# EAGLE board YutaAndJialiang v19 (EAGLE 9.7.0)
NAMES: Juta
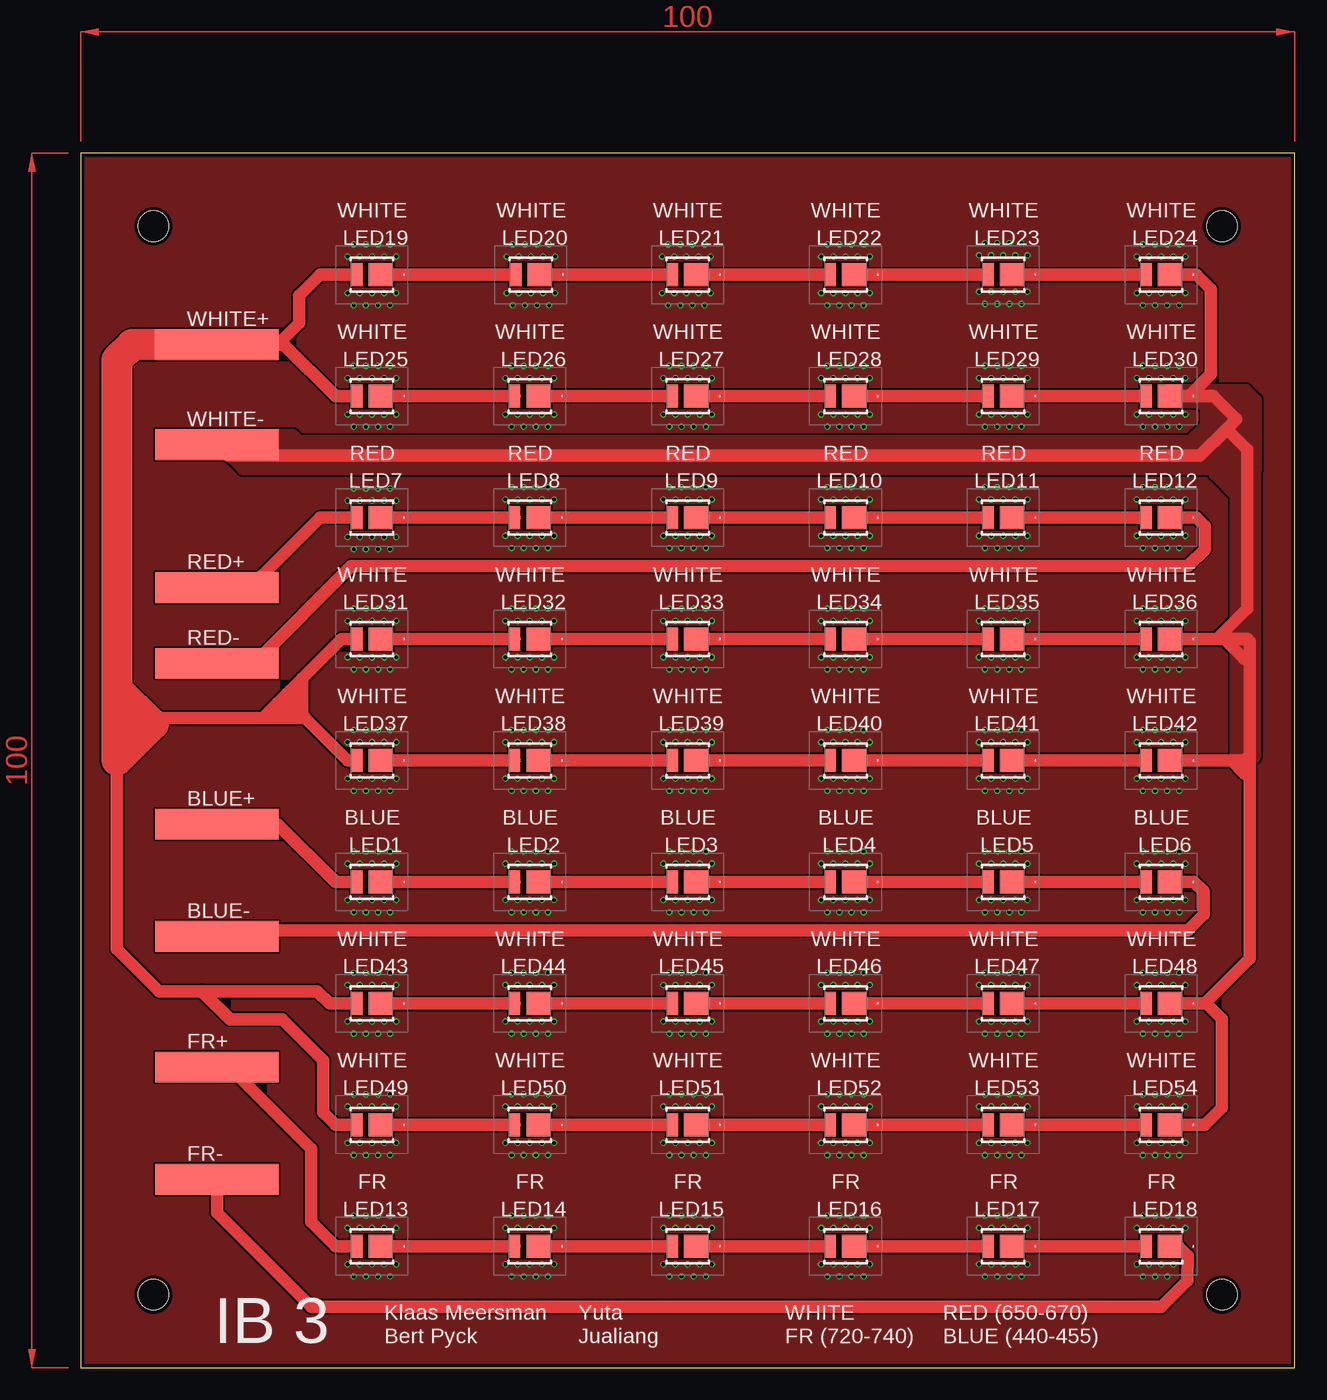
[diagram p0: board, top side]
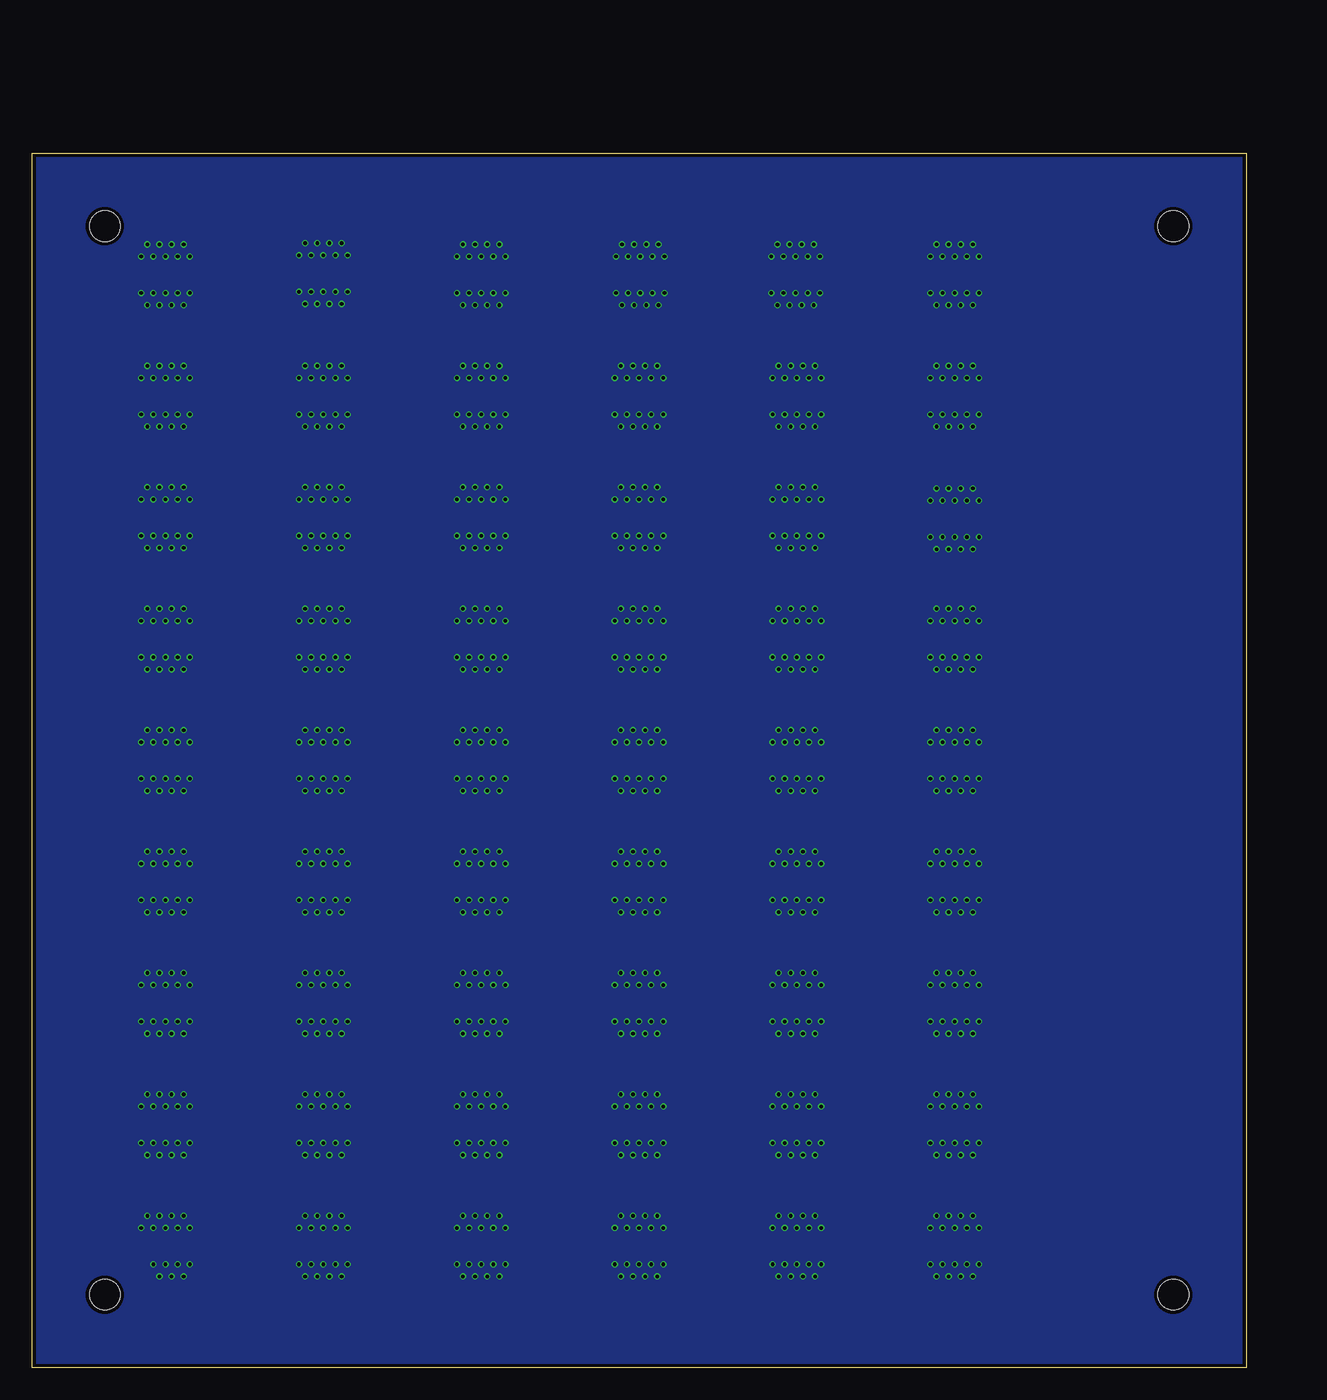
[diagram p1: board, bottom side, seen from below]

Size 99.99 x 100 mm. Coordinates in mm from the lower left corner, seen from the top.
Outline: 0,0 99.99,0 99.99,100 0,100 0,0
Copper layers (1*16): Top 0.035mm / dielectric 1.5mm / Bottom 0.035mm
Design rules "PCBWay_2L_152um-Track": minimum track width 6mil, minimum drill 0.3mm, track to track 6mil, track to pad 6mil, pad to pad 6mil, via to via 6mil, smd to smd 0mil, copper to edge 0.3mm, drill to drill 10mil, minimum pad ring 6mil, minimum via ring 0.1mm, stop-mask expansion 2mil, vias tented up to drill 0.45mm, thermal gap 0.2mm
Net classes: 0 default: width 0.5 mm, drill 0.3 mm, clearance 0.1 mm
Holes 2.5 mm at 6,94 94,94 94,6 6,6

## Footprints (pad centres in the part's own frame; a part is rotated, then mirrored left to right if it is on the bottom)
SOLDERPAD = smd 2.54 x 10.16: 1 0,0
L1SP-PNK1002800000 = smd 2.03 x 1.9: 1 -0.735,0 | smd 0.97 x 1.9: 2 1.265,0

## Placement (x,y rotation side)
BLUE+  [SOLDERPAD]  11.25,44.75 270 top
BLUE-  [SOLDERPAD]  11.25,35.5 270 top
FR+  [SOLDERPAD]  11.25,24.75 270 top
FR-  [SOLDERPAD]  11.25,15.5 270 top
LED1  BLUE  [L1SP-PNK1002800000]  24,40 180 top
LED2  BLUE  [L1SP-PNK1002800000]  37,40 180 top
LED3  BLUE  [L1SP-PNK1002800000]  50,40 180 top
LED4  BLUE  [L1SP-PNK1002800000]  63,40 180 top
LED5  BLUE  [L1SP-PNK1002800000]  76,40 180 top
LED6  BLUE  [L1SP-PNK1002800000]  89,40 180 top
LED7  RED  [L1SP-PNK1002800000]  24,70 180 top
LED8  RED  [L1SP-PNK1002800000]  37,70 180 top
LED9  RED  [L1SP-PNK1002800000]  50,70 180 top
LED10  RED  [L1SP-PNK1002800000]  63,70 180 top
LED11  RED  [L1SP-PNK1002800000]  76,70 180 top
LED12  RED  [L1SP-PNK1002800000]  89,70 180 top
LED13  FR  [L1SP-PNK1002800000]  24,10 180 top
LED14  FR  [L1SP-PNK1002800000]  37,10 180 top
LED15  FR  [L1SP-PNK1002800000]  50,10 180 top
LED16  FR  [L1SP-PNK1002800000]  63,10 180 top
LED17  FR  [L1SP-PNK1002800000]  76,10 180 top
LED18  FR  [L1SP-PNK1002800000]  89,10 180 top
LED19  WHITE  [L1SP-PNK1002800000]  24,90 180 top
LED20  WHITE  [L1SP-PNK1002800000]  37.1,90 180 top
LED21  WHITE  [L1SP-PNK1002800000]  50,90 180 top
LED22  WHITE  [L1SP-PNK1002800000]  63,90 180 top
LED23  WHITE  [L1SP-PNK1002800000]  76,90 180 top
LED24  WHITE  [L1SP-PNK1002800000]  89,90 180 top
LED25  WHITE  [L1SP-PNK1002800000]  24,80 180 top
LED26  WHITE  [L1SP-PNK1002800000]  37,80 180 top
LED27  WHITE  [L1SP-PNK1002800000]  50,80 180 top
LED28  WHITE  [L1SP-PNK1002800000]  63,80 180 top
LED29  WHITE  [L1SP-PNK1002800000]  76,80 180 top
LED30  WHITE  [L1SP-PNK1002800000]  89,80 180 top
LED31  WHITE  [L1SP-PNK1002800000]  24,60 180 top
LED32  WHITE  [L1SP-PNK1002800000]  37,60 180 top
LED33  WHITE  [L1SP-PNK1002800000]  50,60 180 top
LED34  WHITE  [L1SP-PNK1002800000]  63,60 180 top
LED35  WHITE  [L1SP-PNK1002800000]  76,60 180 top
LED36  WHITE  [L1SP-PNK1002800000]  89,60 180 top
LED37  WHITE  [L1SP-PNK1002800000]  24,50 180 top
LED38  WHITE  [L1SP-PNK1002800000]  37,50 180 top
LED39  WHITE  [L1SP-PNK1002800000]  50,50 180 top
LED40  WHITE  [L1SP-PNK1002800000]  63,50 180 top
LED41  WHITE  [L1SP-PNK1002800000]  76,50 180 top
LED42  WHITE  [L1SP-PNK1002800000]  89,50 180 top
LED43  WHITE  [L1SP-PNK1002800000]  24,30 180 top
LED44  WHITE  [L1SP-PNK1002800000]  37,30 180 top
LED45  WHITE  [L1SP-PNK1002800000]  50,30 180 top
LED46  WHITE  [L1SP-PNK1002800000]  63,30 180 top
LED47  WHITE  [L1SP-PNK1002800000]  76,30 180 top
LED48  WHITE  [L1SP-PNK1002800000]  89,30 180 top
LED49  WHITE  [L1SP-PNK1002800000]  24,20 180 top
LED50  WHITE  [L1SP-PNK1002800000]  37,20 180 top
LED51  WHITE  [L1SP-PNK1002800000]  50,20 180 top
LED52  WHITE  [L1SP-PNK1002800000]  63,20 180 top
LED53  WHITE  [L1SP-PNK1002800000]  76,20 180 top
LED54  WHITE  [L1SP-PNK1002800000]  89,20 180 top
RED+  [SOLDERPAD]  11.25,64.25 270 top
RED-  [SOLDERPAD]  11.25,58 270 top
WHITE+  [SOLDERPAD]  11.25,84.25 270 top
WHITE-  [SOLDERPAD]  11.25,76 270 top

## Library data of the parts
BLUE+ BLUE- FR+ FR- RED+ RED- WHITE+ WHITE- = LibraryLEDs
LED1-LED54 = Luxeon SunPlus 2835; DESCRIPTION: High Power LEDs - Single Color 2835 Mid-Power ColorFar Red 720-740nm; HEIGHT: mm; MANUFACTURER_NAME: CREE LED; MANUFACTURER_PART_NUMBER: JE2835AFR-N-0001A0000-N0000001; MOUSER_PART_NUMBER: 941-JE2835AFRN01AN; MOUSER_PRICE-STOCK: https://www.mouser.co.uk/ProductDetail/Cree-LED/JE2835AFR-N-0001A0000-N0000001?qs=tlsG%2FOw5FFhxeS5Ond46kw%3D%3D

## Nets
N$1: LED7.2 RED+.1
N$2: LED28.1 LED29.2
N$3: LED7.1 LED8.2
N$4: LED8.1 LED9.2
N$5: LED9.1 LED10.2
N$6: LED10.1 LED11.2
N$7: LED11.1 LED12.2
N$8: BLUE-.1 LED6.1
N$9: FR+.1 LED13.2
N$10: LED19.2 LED25.2 LED31.2 LED37.2 LED43.2 LED49.2 WHITE+.1
N$11: LED24.1 LED30.1 LED36.1 LED42.1 LED48.1 LED54.1 WHITE-.1
N$12: LED19.1 LED20.2
N$13: LED29.1 LED30.2
N$14: LED20.1 LED21.2
N$15: LED21.1 LED22.2
N$16: LED22.1 LED23.2
N$17: LED13.1 LED14.2
N$18: LED14.1 LED15.2
N$19: LED15.1 LED16.2
N$20: LED16.1 LED17.2
N$21: LED17.1 LED18.2
N$22: LED23.1 LED24.2
N$23: FR-.1 LED18.1
N$24: LED25.1 LED26.2
N$25: LED26.1 LED27.2
N$26: LED27.1 LED28.2
N$27: LED12.1 RED-.1
N$31: LED31.1 LED32.2
N$33: LED32.1 LED33.2
N$35: BLUE+.1 LED1.2
N$36: LED1.1 LED2.2
N$37: LED2.1 LED3.2
N$38: LED3.1 LED4.2
N$39: LED4.1 LED5.2
N$40: LED5.1 LED6.2
N$41: LED33.1 LED34.2
N$42: LED34.1 LED35.2
N$43: LED35.1 LED36.2
N$45: LED37.1 LED38.2
N$46: LED38.1 LED39.2
N$47: LED39.1 LED40.2
N$48: LED40.1 LED41.2
N$49: LED41.1 LED42.2
N$51: LED43.1 LED44.2
N$53: LED44.1 LED45.2
N$54: LED45.1 LED46.2
N$55: LED46.1 LED47.2
N$56: LED47.1 LED48.2
N$58: LED49.1 LED50.2
N$59: LED50.1 LED51.2
N$60: LED51.1 LED52.2
N$61: LED52.1 LED53.2
N$62: LED53.1 LED54.2

## Tracks (layer width: path | path; a pad name or v marks a point on that pad's centre or on a via)
N$1
  Top 1.016: LED7.2 19.73,70 15,65.27 15,64 11.5,64 RED+.1
N$2
  Top 1.016: LED29.2 LED28.1
N$3
  Top 1.016: LED7.1 LED8.2
N$4
  Top 1.016: LED8.1 LED9.2
N$5
  Top 1.016: LED9.1 LED10.2
N$6
  Top 1.016: LED10.1 LED11.2
N$7
  Top 1.016: LED11.1 LED12.2
N$8
  Top 1.016: LED6.1 91.7,40 92.5,39.2 92.5,37.3 91.2,36 11.75,36 BLUE-.1
N$9
  Top 1.016: LED13.2 21,10 19,12 19,18 12.25,24.75 FR+.1
N$10
  Top 1.016: LED19.2 19.73,90 18,88.27 18,86 16.25,84.25 | LED25.2 21,80 16.75,84.25 16.25,84.25 | 18.5,53.5 22,50 LED37.2 | LED43.2 20.5,30 19.5,31 10,31 | LED49.2 21,20 19.99,21.01 19.99,25.29 16.6,28.68 12.32,28.68 10,31 | LED31.2 21.5,60 18.25,56.75 | 10,31 6.47,31 3,34.47 3,50 | WHITE+.1 16.25,84.25 | 6,53 6.5,53.5 15,53.5 | 15,53.5 16,53.5 | 16,53.5 17,53.5 | 17,53.5 18,53.5 | 18,53.5 18.5,53.5 | 17,55.5 16.25,54.75 | 16.25,54.75 15,53.5 | 18.25,56.75 18.25,53.75 18.5,53.5 | 17,53.5 17,55.5 | 17,55.5 17.25,55.75 | 17.25,55.75 18.25,56.75 | 18,53.5 18,55 17.25,55.75 | 16,53.5 16.25,53.75 16.25,54.75
  Top 2.54: WHITE+.1 4.25,84.25 3,83 3,55.9 | 3,55.9 3,54.8 3,50 6,53 5.9,53 3,55.9
N$11
  Top 1.016: LED24.1 91.9,90 93.1,88.8 93.1,81.8 91.3,80 LED30.1 93.3,80 95.2,78.1 94.4,77.3 | 96.3,48.9 96.3,33.7 92.6,30 LED48.1 92.7,30 94,28.7 94,21.4 92.6,20 LED54.1 | WHITE-.1 12.15,75.1 92.2,75.1 94.4,77.3 | LED42.1 94.8,50 | 94.8,50 95.8,50 96.3,50.5 | 96.3,50.5 96.3,59.8 96.1,60 94.2,60 | LED36.1 93.6,60 | 93.6,60 96.1,62.5 96.1,75.6 94.4,77.3 | 93.6,60 94.2,60 | 94.2,60 95.8,58.4 | 96.3,48.9 95.9,48.9 94.8,50 | 96.3,48.9 96.3,50.5
  pour Top (no thermals): 92.2,79.47 92.31,79.41 93.77,77.95 93.54,80.49 89.51,80.49 89.51,79.51 92.07,79.51
  pour Top (no thermals): 92.51,76.39 92.4,76.33 92.27,76.29 16.51,76.29 16.51,74.01 96.79,74.01 96.79,79.69 95.99,80.49 92.71,80.49 92.71,76.73 92.67,76.6 92.61,76.49
  pour Top (no thermals): 90.63,75.51 93.29,75.51 93.29,78.17
  pour Top (no thermals): 13.41,74.01 18.49,74.01 18.49,75.79 17.49,76.79 12.51,76.79 12.51,74.91
  pour Top (no thermals): 95.87,50.67 96.02,50.67 96.02,78.23 95.87,78.23
  pour Top (no thermals): 93.94,74.15 95.73,72.37 95.73,73.77 95.07,74.43 93.87,74.43 93.87,74.29 93.89,74.27
N$12
  Top 1.016: LED19.1 LED20.2
N$13
  Top 1.016: LED30.2 LED29.1
N$14
  Top 1.016: LED20.1 LED21.2
N$15
  Top 1.016: LED21.1 LED22.2
N$16
  Top 1.016: LED22.1 LED23.2
N$17
  Top 1.016: LED13.1 LED14.2
N$18
  Top 1.016: LED14.1 LED15.2
N$19
  Top 1.016: LED15.1 LED16.2
N$20
  Top 1.016: LED16.1 LED17.2
N$21
  Top 1.016: LED17.1 LED18.2
N$22
  Top 1.016: LED23.1 LED24.2
N$23
  Top 1.016: LED18.1 90.4,10 91.18,9.22 91.15,7.15 89,5 19,5 11.25,12.75 FR-.1
N$24
  Top 1.016: LED26.2 LED25.1
N$25
  Top 1.016: LED27.2 LED26.1
N$26
  Top 1.016: LED28.2 LED27.1
N$27
  Top 1.016: LED12.1 91.9,70 92.58,69.32 92.58,67.38 91.2,66 22.28,66 14.28,58 RED-.1
N$31
  Top 1.016: LED31.1 LED32.2
N$33
  Top 1.016: LED32.1 LED33.2
N$35
  Top 1.016: LED1.2 21,40 16.25,44.75 BLUE+.1
N$36
  Top 1.016: LED1.1 LED2.2
N$37
  Top 1.016: LED2.1 LED3.2
N$38
  Top 1.016: LED3.1 LED4.2
N$39
  Top 1.016: LED4.1 LED5.2
N$40
  Top 1.016: LED5.1 LED6.2
N$41
  Top 1.016: LED33.1 LED34.2
N$42
  Top 1.016: LED34.1 LED35.2
N$43
  Top 1.016: LED35.1 LED36.2
N$45
  Top 1.016: LED38.2 LED37.1
N$46
  Top 1.016: LED39.2 LED38.1
N$47
  Top 1.016: LED40.2 LED39.1
N$48
  Top 1.016: LED41.2 LED40.1
N$49
  Top 1.016: LED42.2 LED41.1
N$51
  Top 1.016: LED43.1 LED44.2
N$53
  Top 1.016: LED44.1 LED45.2
N$54
  Top 1.016: LED45.1 LED46.2
N$55
  Top 1.016: LED46.1 LED47.2
N$56
  Top 1.016: LED47.1 LED48.2
N$58
  Top 1.016: LED50.2 LED49.1
N$59
  Top 1.016: LED51.2 LED50.1
N$60
  Top 1.016: LED52.2 LED51.1
N$61
  Top 1.016: LED53.2 LED52.1
N$62
  Top 1.016: LED54.2 LED53.1
THERMAL  (via drill 0.3 pad 0.34)
  other vias: 22.5,92.5 23.5,92.5 24.5,92.5 25.5,92.5 22,91.5 23,91.5 24,91.5 25,91.5 26,91.5 22,88.5 23,88.5 24,88.5 25,88.5 26,88.5 22.5,87.5 23.5,87.5 24.5,87.5 25.5,87.5 22,78.5 23,78.5 24,78.5 25,78.5 26,78.5 22.5,77.5 23.5,77.5 24.5,77.5 25.5,77.5 35.5,82.5 36.5,82.5 37.5,82.5 38.5,82.5 35,81.5 36,81.5 37,81.5 38,81.5 39,81.5 35,78.5 36,78.5 37,78.5 38,78.5 39,78.5 35.5,77.5 36.5,77.5 37.5,77.5 38.5,77.5 48.5,82.5 49.5,82.5 50.5,82.5 51.5,82.5 48,81.5 49,81.5 50,81.5 51,81.5 52,81.5 48,78.5 49,78.5 50,78.5 51,78.5 52,78.5 48.5,77.5 49.5,77.5 50.5,77.5 51.5,77.5 61.5,82.5 62.5,82.5 63.5,82.5 64.5,82.5 61,81.5 62,81.5 63,81.5 64,81.5 65,81.5 61,78.5 62,78.5 63,78.5 64,78.5 65,78.5 61.5,77.5 62.5,77.5 63.5,77.5 64.5,77.5 48.4,92.5 49.4,92.5 50.4,92.5 51.4,92.5 47.9,91.5 48.9,91.5 49.9,91.5 50.9,91.5 51.9,91.5 47.9,88.5 48.9,88.5 49.9,88.5 50.9,88.5 51.9,88.5 48.4,87.5 49.4,87.5 50.4,87.5 51.4,87.5 35.6,92.5 36.6,92.5 37.6,92.5 38.6,92.5 35.1,91.5 36.1,91.5 37.1,91.5 38.1,91.5 39.1,91.5 35.1,88.5 36.1,88.5 37.1,88.5 38.1,88.5 39.1,88.5 35.6,87.5 36.6,87.5 37.6,87.5 38.6,87.5 74.5,82.5 75.5,82.5 76.5,82.5 77.5,82.5 74,81.5 75,81.5 76,81.5 77,81.5 78,81.5 74,78.5 75,78.5 76,78.5 77,78.5 78,78.5 74.5,77.5 75.5,77.5 76.5,77.5 77.5,77.5 87.5,82.5 88.5,82.5 89.5,82.5 90.5,82.5 87,81.5 88,81.5 89,81.5 90,81.5 91,81.5 87,78.5 88,78.5 89,78.5 90,78.5 91,78.5 87.5,77.5 88.5,77.5 89.5,77.5 90.5,77.5 22.5,72.4 23.5,72.4 24.5,72.4 25.5,72.4 22,71.4 23,71.4 24,71.4 25,71.4 26,71.4 22,68.4 23,68.4 24,68.4 25,68.4 26,68.4 22.5,67.4 23.5,67.4 24.5,67.4 25.5,67.4 35.5,72.5 36.5,72.5 37.5,72.5 38.5,72.5 35,71.5 36,71.5 37,71.5 38,71.5 39,71.5 35,68.5 36,68.5 37,68.5 38,68.5 39,68.5 35.5,67.5 36.5,67.5 37.5,67.5 38.5,67.5 48.5,72.5 49.5,72.5 50.5,72.5 51.5,72.5 48,71.5 49,71.5 50,71.5 51,71.5 52,71.5 48,68.5 49,68.5 50,68.5 51,68.5 52,68.5 48.5,67.5 49.5,67.5 50.5,67.5 51.5,67.5 61.5,72.5 62.5,72.5 63.5,72.5 64.5,72.5 61,71.5 62,71.5 63,71.5 64,71.5 65,71.5 61,68.5 62,68.5 63,68.5 64,68.5 65,68.5 61.5,67.5 62.5,67.5 63.5,67.5 64.5,67.5 74.5,72.5 75.5,72.5 76.5,72.5 77.5,72.5 74,71.5 75,71.5 76,71.5 77,71.5 78,71.5 74,68.5 75,68.5 76,68.5 77,68.5 78,68.5 74.5,67.5 75.5,67.5 76.5,67.5 77.5,67.5 87.5,72.5 88.5,72.5 89.5,72.5 90.5,72.5 87,71.5 88,71.5 89,71.5 90,71.5 91,71.5 87,68.5 88,68.5 89,68.5 90,68.5 91,68.5 87.5,67.5 88.5,67.5 89.5,67.5 90.5,67.5 22.5,62.5 23.5,62.5 24.5,62.5 25.5,62.5 22,61.5 23,61.5 24,61.5 25,61.5 26,61.5 22,58.5 23,58.5 24,58.5 25,58.5 26,58.5 22.5,57.5 23.5,57.5 24.5,57.5 25.5,57.5 35.5,62.5 36.5,62.5 37.5,62.5 38.5,62.5 35,61.5 36,61.5 37,61.5 38,61.5 39,61.5 35,58.5 36,58.5 37,58.5 38,58.5 39,58.5 35.5,57.5 36.5,57.5 37.5,57.5 38.5,57.5 48.5,62.5 49.5,62.5 50.5,62.5 51.5,62.5 48,61.5 49,61.5 50,61.5 51,61.5 52,61.5 48,58.5 49,58.5 50,58.5 51,58.5 52,58.5 48.5,57.5 49.5,57.5 50.5,57.5 51.5,57.5 61.5,62.5 62.5,62.5 63.5,62.5 64.5,62.5 61,61.5 62,61.5 63,61.5 64,61.5 65,61.5 61,58.5 62,58.5 63,58.5 64,58.5 65,58.5 61.5,57.5 62.5,57.5 63.5,57.5 64.5,57.5 74.5,62.5 75.5,62.5 76.5,62.5 77.5,62.5 74,61.5 75,61.5 76,61.5 77,61.5 78,61.5 74,58.5 75,58.5 76,58.5 77,58.5 78,58.5 74.5,57.5 75.5,57.5 76.5,57.5 77.5,57.5 87.5,62.5 88.5,62.5 89.5,62.5 90.5,62.5 87,61.5 88,61.5 89,61.5 90,61.5 91,61.5 87,58.5 88,58.5 89,58.5 90,58.5 91,58.5 87.5,57.5 88.5,57.5 89.5,57.5 90.5,57.5 22.5,52.5 23.5,52.5 24.5,52.5 25.5,52.5 22,51.5 23,51.5 24,51.5 25,51.5 26,51.5 22,48.5 23,48.5 24,48.5 25,48.5 26,48.5 22.5,47.5 23.5,47.5 24.5,47.5 25.5,47.5 35.5,52.5 36.5,52.5 37.5,52.5 38.5,52.5 35,51.5 36,51.5 37,51.5 38,51.5 39,51.5 35,48.5 36,48.5 37,48.5 38,48.5 39,48.5 35.5,47.5 36.5,47.5 37.5,47.5 38.5,47.5 48.5,52.5 49.5,52.5 50.5,52.5 51.5,52.5 48,51.5 49,51.5 50,51.5 51,51.5 52,51.5 48,48.5 49,48.5 50,48.5 51,48.5 52,48.5 48.5,47.5 49.5,47.5 50.5,47.5 51.5,47.5 61.5,52.5 62.5,52.5 63.5,52.5 64.5,52.5 61,51.5 62,51.5 63,51.5 64,51.5 65,51.5 61,48.5 62,48.5 63,48.5 64,48.5 65,48.5 61.5,47.5 62.5,47.5 63.5,47.5 64.5,47.5 74.5,52.5 75.5,52.5 76.5,52.5 77.5,52.5 74,51.5 75,51.5 76,51.5 77,51.5 78,51.5 74,48.5 75,48.5 76,48.5 77,48.5 78,48.5 74.5,47.5 75.5,47.5 76.5,47.5 77.5,47.5 87.5,52.5 88.5,52.5 89.5,52.5 90.5,52.5 87,51.5 88,51.5 89,51.5 90,51.5 91,51.5 87,48.5 88,48.5 89,48.5 90,48.5 91,48.5 87.5,47.5 88.5,47.5 89.5,47.5 90.5,47.5 22.5,42.5 23.5,42.5 24.5,42.5 25.5,42.5 22,41.5 23,41.5 24,41.5 25,41.5 26,41.5 22,38.5 23,38.5 24,38.5 25,38.5 26,38.5 22.5,37.5 23.5,37.5 24.5,37.5 25.5,37.5 35.5,42.5 36.5,42.5 37.5,42.5 38.5,42.5 35,41.5 36,41.5 37,41.5 38,41.5 39,41.5 35,38.5 36,38.5 37,38.5 38,38.5 39,38.5 35.5,37.5 36.5,37.5 37.5,37.5 38.5,37.5 48.5,42.5 49.5,42.5 50.5,42.5 51.5,42.5 48,41.5 49,41.5 50,41.5 51,41.5 52,41.5 48,38.5 49,38.5 50,38.5 51,38.5 52,38.5 48.5,37.5 49.5,37.5 50.5,37.5 51.5,37.5 61.5,42.5 62.5,42.5 63.5,42.5 64.5,42.5 61,41.5 62,41.5 63,41.5 64,41.5 65,41.5 61,38.5 62,38.5 63,38.5 64,38.5 65,38.5 61.5,37.5 62.5,37.5 63.5,37.5 64.5,37.5 74.5,42.5 75.5,42.5 76.5,42.5 77.5,42.5 74,41.5 75,41.5 76,41.5 77,41.5 78,41.5 74,38.5 75,38.5 76,38.5 77,38.5 78,38.5 74.5,37.5 75.5,37.5 76.5,37.5 77.5,37.5 87.5,42.5 88.5,42.5 89.5,42.5 90.5,42.5 87,41.5 88,41.5 89,41.5 90,41.5 91,41.5 87,38.5 88,38.5 89,38.5 90,38.5 91,38.5 87.5,37.5 88.5,37.5 89.5,37.5 90.5,37.5 22.5,32.5 23.5,32.5 24.5,32.5 25.5,32.5 22,31.5 23,31.5 24,31.5 25,31.5 26,31.5 22,28.5 23,28.5 24,28.5 25,28.5 26,28.5 22.5,27.5 23.5,27.5 24.5,27.5 25.5,27.5 35.5,32.5 36.5,32.5 37.5,32.5 38.5,32.5 35,31.5 36,31.5 37,31.5 38,31.5 39,31.5 35,28.5 36,28.5 37,28.5 38,28.5 39,28.5 35.5,27.5 36.5,27.5 37.5,27.5 38.5,27.5 48.5,32.5 49.5,32.5 50.5,32.5 51.5,32.5 48,31.5 49,31.5 50,31.5 51,31.5 52,31.5 48,28.5 49,28.5 50,28.5 51,28.5 52,28.5 48.5,27.5 49.5,27.5 50.5,27.5 51.5,27.5 61.5,32.5 62.5,32.5 63.5,32.5 64.5,32.5 61,31.5 62,31.5 63,31.5 64,31.5 65,31.5 61,28.5 62,28.5 63,28.5 64,28.5 65,28.5 61.5,27.5 62.5,27.5 63.5,27.5 64.5,27.5 74.5,32.5 75.5,32.5 76.5,32.5 77.5,32.5 74,31.5 75,31.5 76,31.5 77,31.5 78,31.5 74,28.5 75,28.5 76,28.5 77,28.5 78,28.5 74.5,27.5 75.5,27.5 76.5,27.5 77.5,27.5 87.5,32.5 88.5,32.5 89.5,32.5 90.5,32.5 87,31.5 88,31.5 89,31.5 90,31.5 91,31.5 87,28.5 88,28.5 89,28.5 90,28.5 91,28.5 87.5,27.5 88.5,27.5 89.5,27.5 90.5,27.5 22.5,22.5 23.5,22.5 24.5,22.5 25.5,22.5 22,21.5 23,21.5 24,21.5 25,21.5 26,21.5 22,18.5 23,18.5 24,18.5 25,18.5 26,18.5 22.5,17.5 23.5,17.5 24.5,17.5 25.5,17.5 35.5,22.5 36.5,22.5 37.5,22.5 38.5,22.5 35,21.5 36,21.5 37,21.5 38,21.5 39,21.5 35,18.5 36,18.5 37,18.5 38,18.5 39,18.5 35.5,17.5 36.5,17.5 37.5,17.5 38.5,17.5 48.5,22.5 49.5,22.5 50.5,22.5 51.5,22.5 48,21.5 49,21.5 50,21.5 51,21.5 52,21.5 48,18.5 49,18.5 50,18.5 51,18.5 52,18.5 48.5,17.5 49.5,17.5 50.5,17.5 51.5,17.5 61.5,22.5 62.5,22.5 63.5,22.5 64.5,22.5 61,21.5 62,21.5 63,21.5 64,21.5 65,21.5 61,18.5 62,18.5 63,18.5 64,18.5 65,18.5 61.5,17.5 62.5,17.5 63.5,17.5 64.5,17.5 74.5,22.5 75.5,22.5 76.5,22.5 77.5,22.5 74,21.5 75,21.5 76,21.5 77,21.5 78,21.5 74,18.5 75,18.5 76,18.5 77,18.5 78,18.5 74.5,17.5 75.5,17.5 76.5,17.5 77.5,17.5 87.5,22.5 88.5,22.5 89.5,22.5 90.5,22.5 87,21.5 88,21.5 89,21.5 90,21.5 91,21.5 87,18.5 88,18.5 89,18.5 90,18.5 91,18.5 87.5,17.5 88.5,17.5 89.5,17.5 90.5,17.5 22.5,12.5 23.5,12.5 24.5,12.5 25.5,12.5 22,11.5 23,11.5 24,11.5 25,11.5 26,11.5 22,8.5 23,8.5 24,8.5 25,8.5 26,8.5 22.5,7.5 23.5,7.5 24.5,7.5 25.5,7.5 35.5,12.5 36.5,12.5 37.5,12.5 38.5,12.5 35,11.5 36,11.5 37,11.5 38,11.5 39,11.5 35,8.5 36,8.5 37,8.5 38,8.5 39,8.5 35.5,7.5 36.5,7.5 37.5,7.5 38.5,7.5 48.5,12.5 49.5,12.5 50.5,12.5 51.5,12.5 48,11.5 49,11.5 50,11.5 51,11.5 52,11.5 48,8.5 49,8.5 50,8.5 51,8.5 52,8.5 48.5,7.5 49.5,7.5 50.5,7.5 51.5,7.5 61.5,12.5 62.5,12.5 63.5,12.5 64.5,12.5 61,11.5 62,11.5 63,11.5 64,11.5 65,11.5 61,8.5 62,8.5 63,8.5 64,8.5 65,8.5 61.5,7.5 62.5,7.5 63.5,7.5 64.5,7.5 74.5,12.5 75.5,12.5 76.5,12.5 77.5,12.5 74,11.5 75,11.5 76,11.5 77,11.5 78,11.5 74,8.5 75,8.5 76,8.5 77,8.5 78,8.5 74.5,7.5 75.5,7.5 76.5,7.5 77.5,7.5 87.5,12.5 88.5,12.5 89.5,12.5 90.5,12.5 87,11.5 88,11.5 89,11.5 90,11.5 91,11.5 87,8.5 88,8.5 89,8.5 90,8.5 87.5,7.5 88.5,7.5 89.5,7.5 61.5,92.5 62.5,92.5 63.5,92.5 64.5,92.5 61,91.5 62,91.5 63,91.5 64,91.5 65,91.5 61,88.5 62,88.5 63,88.5 64,88.5 65,88.5 61.5,87.5 62.5,87.5 63.5,87.5 64.5,87.5 74.5,92.6 75.5,92.6 76.5,92.6 77.5,92.6 74,91.6 75,91.6 76,91.6 77,91.6 78,91.6 74,88.6 75,88.6 76,88.6 77,88.6 78,88.6 74.5,87.6 75.5,87.6 76.5,87.6 77.5,87.6 87.5,92.5 88.5,92.5 89.5,92.5 90.5,92.5 87,91.5 88,91.5 89,91.5 90,91.5 91,91.5 87,88.5 88,88.5 89,88.5 90,88.5 91,88.5 87.5,87.5 88.5,87.5 89.5,87.5 90.5,87.5 22.5,82.5 23.5,82.5 24.5,82.5 25.5,82.5 22,81.5 23,81.5 24,81.5 25,81.5 26,81.5
  pour Bottom: 0.08,0.08 99.92,0.08 99.92,99.92 0.08,99.92
  pour Top (rank 2): 0.51,0.51 99.49,0.51 99.49,99.49 0.51,99.49
(copper drawn outside any net)
  shapes: Top area x2

## Text on the board
tPlace: IB 3 | Klaas Meersman / Bert Pyck | Yuta / Jualiang | WHITE / FR (720-740) | RED (650-670) / BLUE (440-455)